# Altium PCB CH32X033F-R0-1v0.PcbDoc
Units mil, origin at the board's own origin, x right, y up, seen from the top; angles counter-clockwise.
Board outline 1535.59 x 1780 mil, 2 copper layers (Top Layer, Bottom Layer); 26 components, 31 nets, 125 pads, 185 vias.
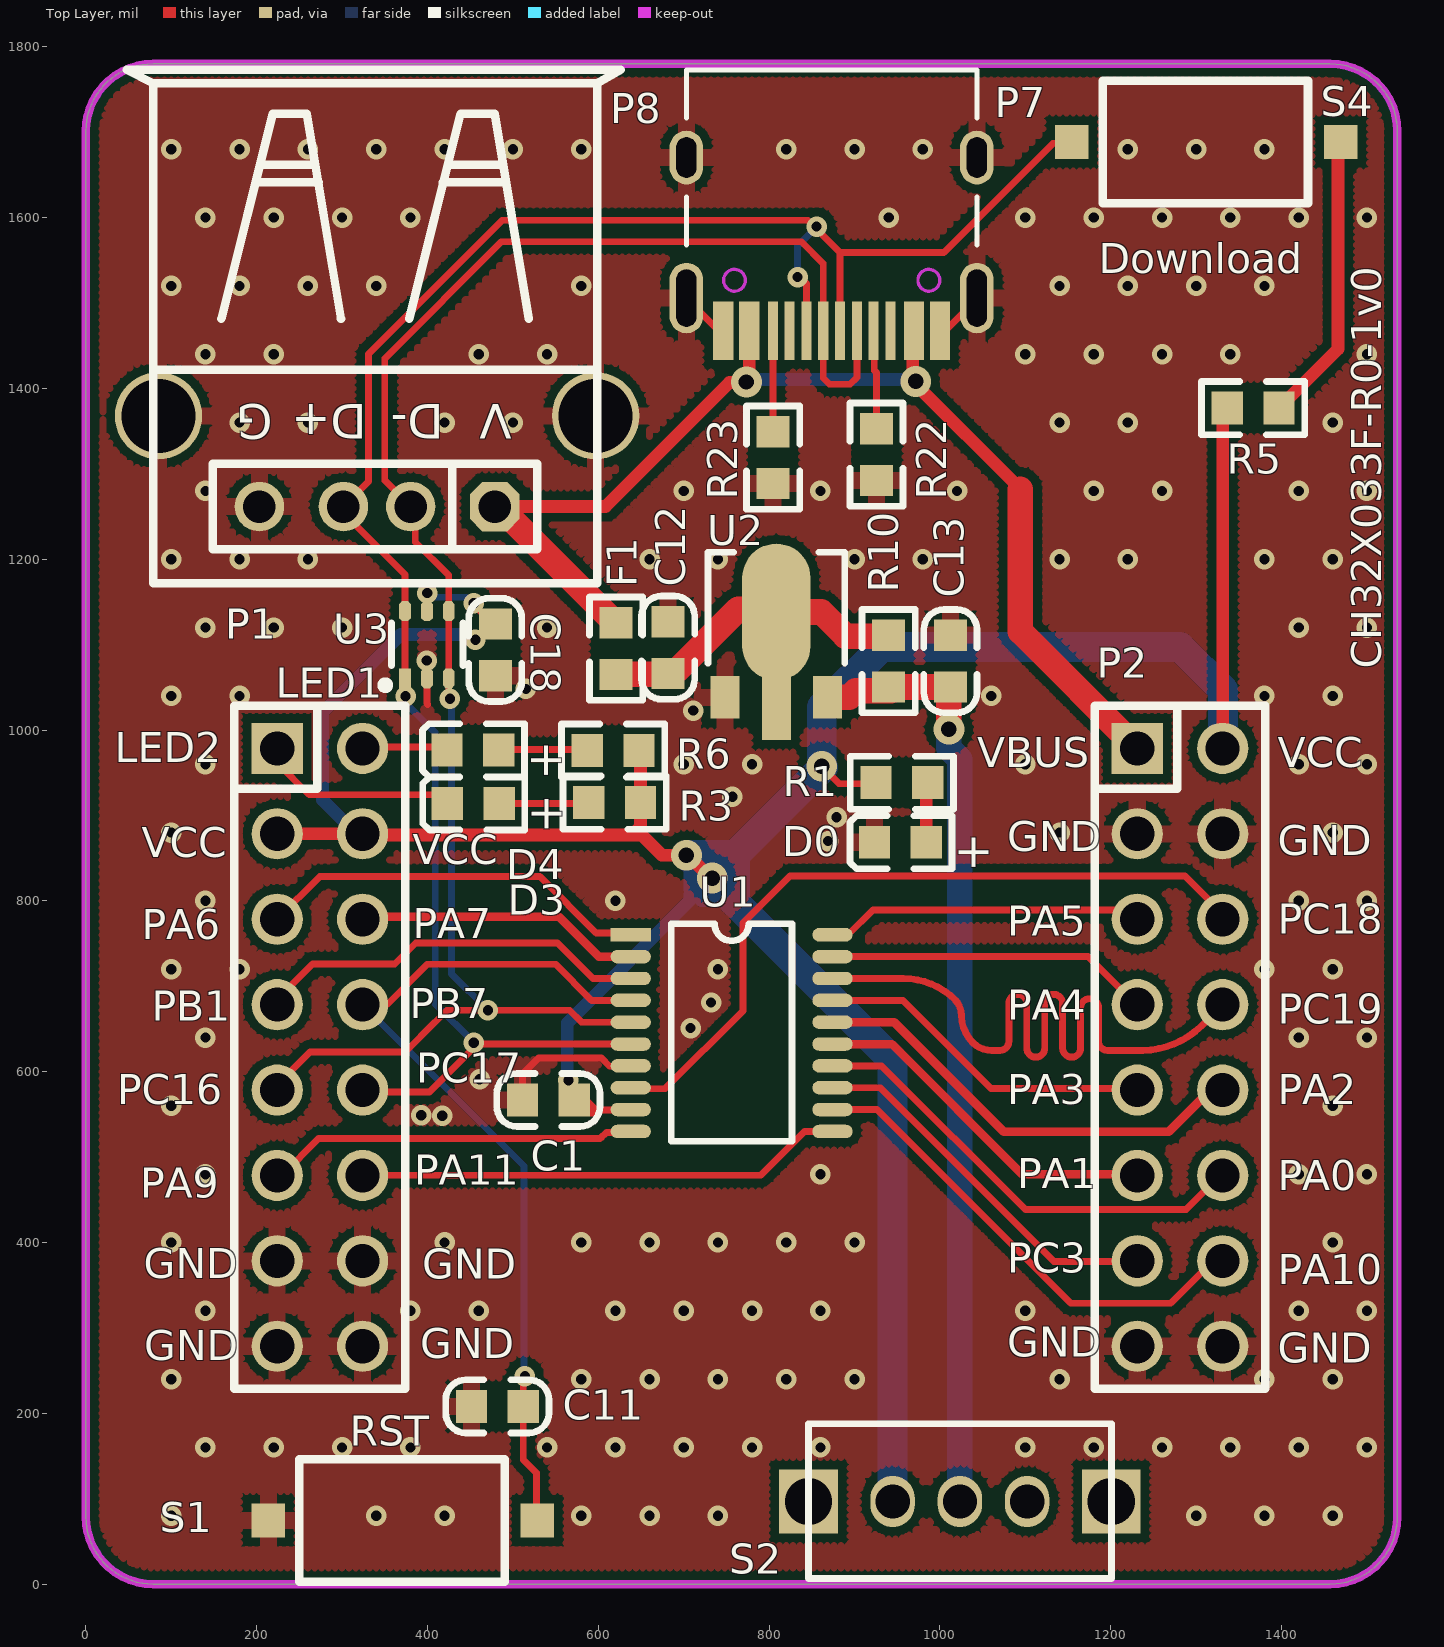
[diagram p0: Top Layer view]
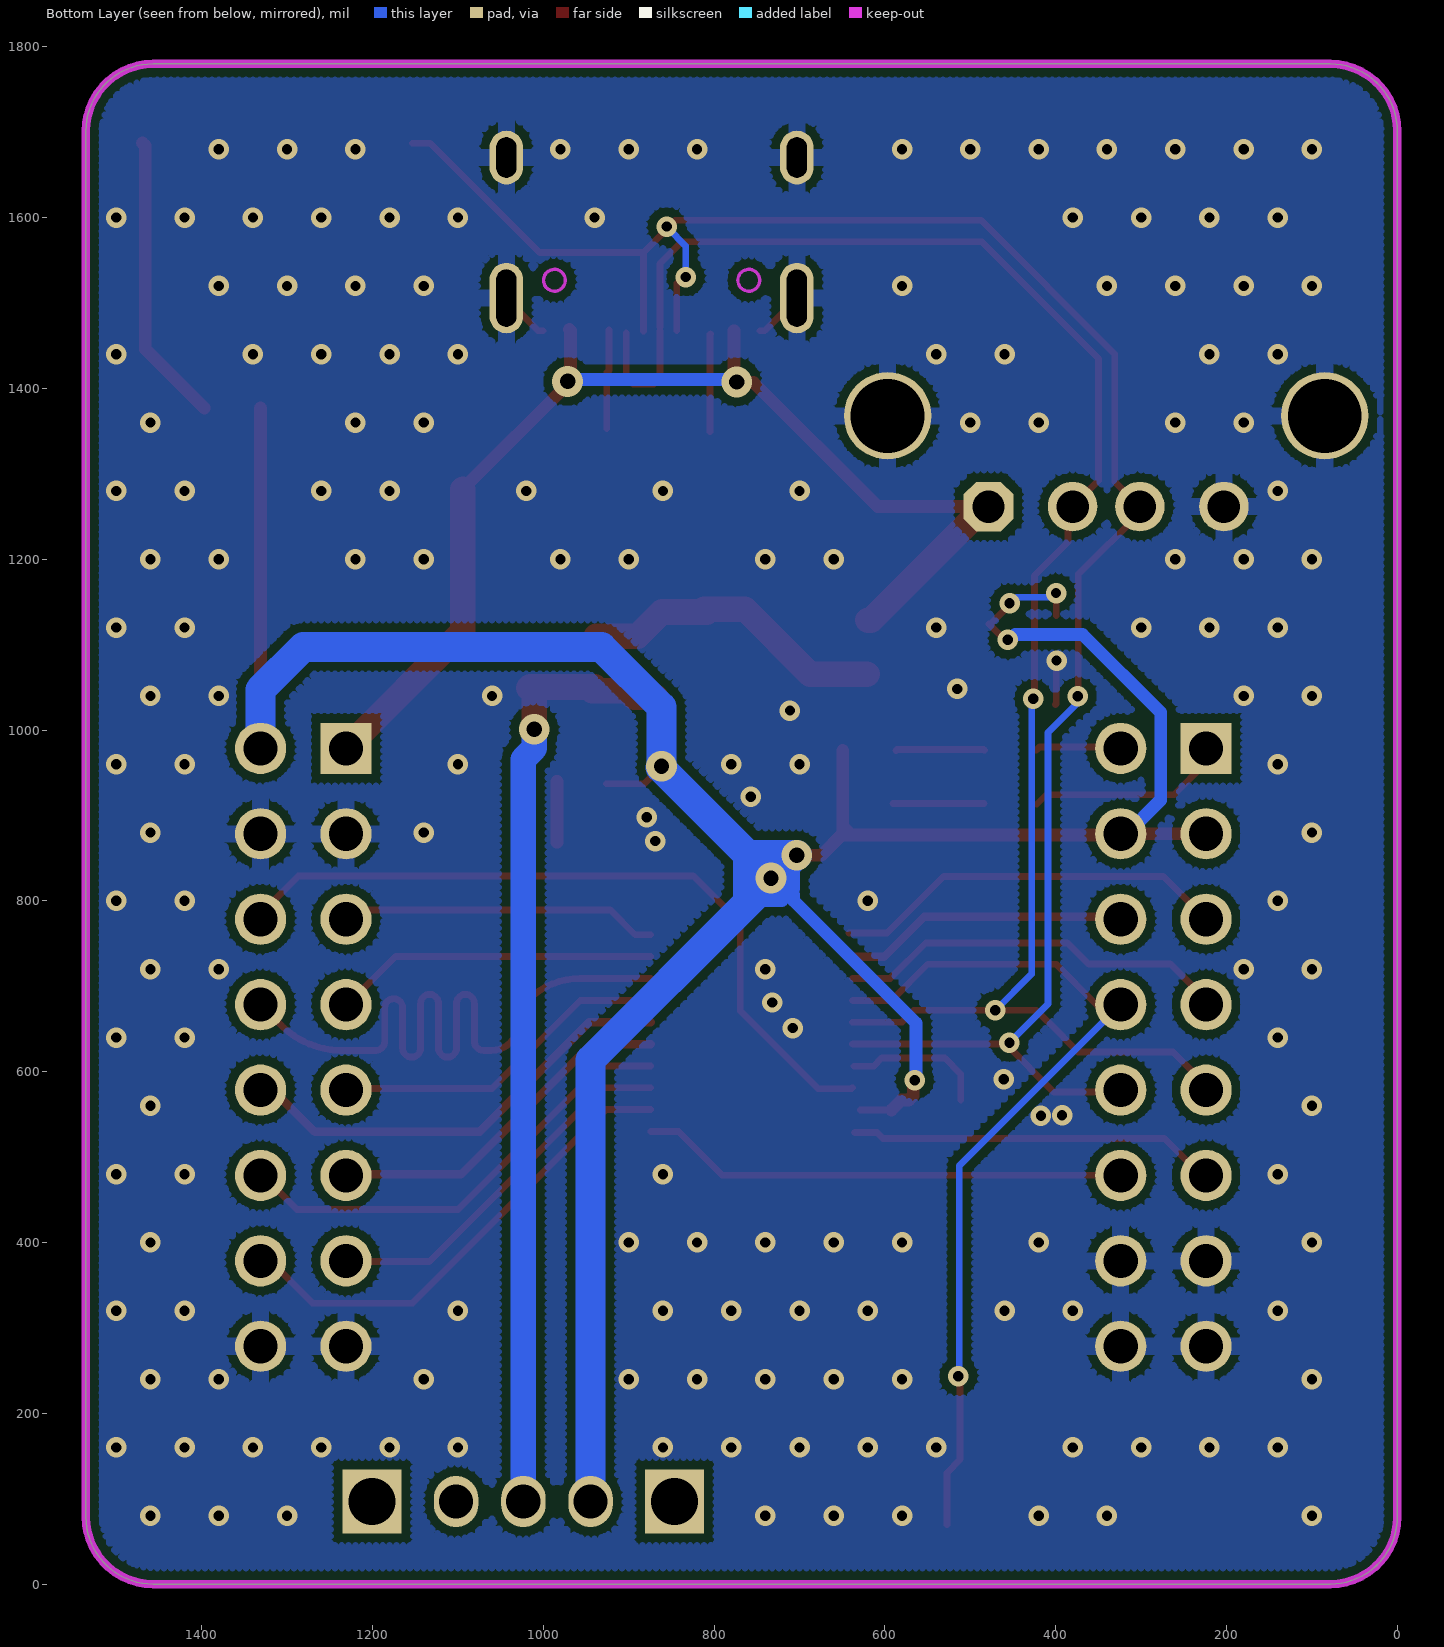
[diagram p1: Bottom Layer view, seen from below]

## Layer stack, top to bottom
Top Solder: solder mask 0.4, Solder Resist, Dk 3.5
Top Layer: signal copper 1.4
Dielectric1: dielectric 12.6, FR-4, Dk 4.8
Bottom Layer: signal copper 1.4
Bottom Solder: solder mask 0.4, Solder Resist, Dk 3.5

## Board outline
0,78.74 0,1701.26 cw(c78.74,1701.26) 78.74,1780 1456.85,1780 cw(c1456.85,1701.26) 1535.59,1701.26 1535.59,78.74 cw(c1456.85,78.74) 1456.85,0 78.74,0 cw(c78.74,78.74)

## Design rules (kind name [scope] priority, off if disabled: settings)
Clearance Clearance_1 [InPolygon] p1: gap=10 ignorepadtopadclearanceinfootprint=FALSE except(0: Arc-Hole Track-Hole SMDPad-Hole THPad-Hole Via-Hole Fill-Hole Poly-Hole Region-Hole Text-Hole)
Clearance [All] p2: gap=6 ignorepadtopadclearanceinfootprint=FALSE except(0: Arc-Hole Track-Hole SMDPad-Hole THPad-Hole Via-Hole Fill-Hole Poly-Hole Region-Hole Text-Hole)
ComponentClearance [All] p1 off: gap=10 collisioncheckmode=3 verticalgap=10 showdistances=FALSE
DiffPairsRouting [All] p1: maxlimit=10 minlimit=7 mostfreqgap=8 toplayer_minwidth=15 toplayer_maxwidth=15 toplayer_prefwidth=15 bottomlayer_minwidth=15 bottomlayer_maxwidth=15 bottomlayer_prefwidth=15 maxuncoupledlength=500
MinimumSolderMaskSliver [All] p1 off: minsoldermaskwidth=10
PolygonConnect PolygonConnect_1 [IsVia] p1: connectstyle=Direct reliefconductorwidth=10 reliefentries=4 polygonreliefangle="90 Angle" airgapwidth=10
PolygonConnect [All] p2: connectstyle=Relief reliefconductorwidth=20 reliefentries=4 polygonreliefangle="90 Angle" airgapwidth=10
RoutingVias [All] p1: holewidth=16 width=28 viastyle="Through Hole" minholewidth=12 minwidth=24 maxholewidth=28 maxwidth=50
SilkToSilkClearance [All] p1 off: silktosilkclearance=10
SilkToSolderMaskClearance [IsPad] p1 off: minsilkscreentomaskgap=10 clearancetoexposedcopper=TRUE
SolderMaskExpansion [All] p1: expansion=2 istentingtop=FALSE
Width [All] p1: maxlimit=100 minlimit=6 preferedwidth=10
25 further rules are at their usual default settings.

## Components (designator, comment, footprint, x,y, rotation, side; value= is the part's Value field where it differs from the comment)
C1 "0.1uF" 0603_C 571.88,566.84 r180 top
C11 "0.1uF" 0603_C 451.41,208.11 r0 top
C12 "10uF" 0603_C 681.7,1066.16 r90 top
C13 "10uF" 0603_C 1012.26,1050.44 r90 top
C18 "0.1uF" 0603_C 479.39,1063.63 r90 top
D0 "POWER  red" 0603+ 984.06,868.62 r180 top
D3 "LED2" 0603+ 483.86,914 r180 top
D4 "LED1" 0603+ 483.43,976.38 r180 top
F1 "500mA" 0603 620.81,1125.75 r270 top
P1 "HEADER 8x2" IDC16-2.54mm 223.97,978.51 r0 top
P2 "Header 8X2" IDC16-2.54mm 1231.02,978.51 r0 top
P7 "TYPE-C" TYPE-C-Receptacle-2.0 873.2,1467.6 r180 top
P8 "USB_A" USBAF 478.73,1261.66 r180 top
R1 "1K" 0603 985.77,938.35 r180 top
R3 "1K" 0603 649.34,914.99 r180 top
R5 "4.7K" 0603 1336.37,1377 r0 top
R6 "1K" 0603 647.67,975.98 r180 top
R10 "NC(0Ω)" 0603 939.89,1050.44 r90 top
R22 "5.1K" 0603 925.71,1352.7 r270 top
R23 "5.1K" 0603 804.71,1349.28 r270 top
S1 "RST" SMD_6.1x3.65x2.5mm-KEY 528.62,74.45 r180 top
S2 "SW" SW1 1023.4,96.69 r180 top
S4 "Download" SMD_6.1x3.65x2.5mm-KEY 1469.38,1688.6 r180 top
U1 "CH32X033F8P6" TSSOP20 638.1,760.33 r270 top
U2 "HT7533" SOT-89 748.48,1038.25 r0 top
U3 "CH412K" SOT-363 373.72,1060.54 r0 top

## Footprints (in the part's own frame and the unit in brackets; to place one, negate y for a bottom-side part, rotate by r counter-clockwise, add the part's x,y. Pads: shape width x height; smd on the part's side, far side on the other; paste and mask are expansions set on the pad)
0603 [mm]
  rect 0.93x0.98 smd: 1(0,0) 2(1.54,0)
  silkscreen extent -0.76,-0.79 2.3,0.79
0603+ [mm]
  rect 0.93x0.98 smd: 1(0,0) 2(1.54,0)
  silkscreen extent -0.76,-0.79 2.27,0.79
0603_C [mm]
  rect 0.93x0.98 smd mask+0.051: 1(0,0) 2(1.54,0)
  silkscreen extent -0.76,-0.79 2.31,0.79
IDC16-2.54mm [mil]
  rect 60x60 hole 40: 1(0,0)
  round 60 hole 40: 2(100,0) 3(0,-100) 4(100,-100) 5(0,-200) 6(100,-200) 7(0,-300) 8(100,-300) 9(0,-400) 10(100,-400) 11(0,-500) 12(100,-500) 13(0,-600) 14(100,-600) 15(0,-700) 16(100,-700)
  silkscreen extent -50,-750 150,50
SMD_6.1x3.65x2.5mm-KEY [mm]
  rect 1x1 smd: 1(0,0) 2(8,0)
  silkscreen extent 0.98,-1.83 7.08,1.83
SOT-89 [mil]
  rect 34x50 smd: 1(0,0) 3(120,0)
  rect 34x100 smd: 2(60,0)
  oval 80x160 smd: ""(60,100)
  silkscreen extent -20,40 140,170
SOT-363 [mm]
  rect 0.35x0.6 smd mask+0.051: 1(0,0)
  oct 0.35x0.6 smd mask+0.051: 2(0.65,0) 3(1.3,0) 4(1.3,2) 5(0.65,2) 6(0,2)
  silkscreen extent -0.7,-0.31 1.73,1.65
SW1 [mm]
  rect 1.75x1.9 hole 1.4: 0(-4.5,0) 0(4.5,0)
  oval 1.321x1.524 hole 1.016: 1(0,0) 2(-2,0) 3(2,0)
  silkscreen extent -4.51,-2.31 4.5,2.29
TSSOP20 [mm]
  rect 0.4x1.2 smd mask+0.05: 1(0,-0.003)
  oval 0.4x1.2 smd mask+0.05: 2(0.65,-0.003) 3(1.3,-0.003) 4(1.951,-0.003) 5(2.601,-0.003) 6(3.251,-0.003) 7(3.899,-0.003) 8(4.549,-0.003) 9(5.199,-0.003) 10(5.85,-0.003) 11(5.85,5.997) 12(5.199,5.997) 13(4.549,5.997) 14(3.899,5.997) 15(3.251,5.997) 16(2.601,5.997) 17(1.951,5.997) 18(1.3,5.997) 19(0.65,5.997) 20(0,5.997)
  silkscreen extent -0.32,1.2 6.14,4.79
TYPE-C-Receptacle-2.0 [mm]
  oval 1x2.1 hole 0.6 slot 1.7 at 90 deg: 0(-4.32,-0.97) 0(4.32,-0.97)
  oval 1x1.6 hole 0.6 slot 1.2 at 90 deg: 0(-4.32,-5.15) 0(4.32,-5.15)
  rect 0.6x1.75 smd mask+0.051: A1(-3.225,0) A4(-2.45,0) B1(3.225,0) B4(2.45,0)
  rect 0.3x1.75 smd mask+0.051: A5(-1.25,0) A6(-0.25,0) A7(0.25,0) A8(1.25,0) B5(1.75,0) B6(0.75,0) B7(-0.75,0) B8(-1.75,0)
  Keep-Out Layer circle w0.1: c2.89,-1.5 r0.325
  Keep-Out Layer circle w0.1: c-2.89,-1.5 r0.325
  silkscreen extent -4.32,-7.75 4.32,-2.55
USBAF [mm]
  round 2.6 hole 2.2: 0(-3,-2.7) 0(10,-2.7)
  oct 1.473x1.473 hole 0.965: 1(0,0)
  round 1.473 hole 0.965: 2(2.5,0) 3(4.5,0) 4(7,0)
  silkscreen extent -3.75,-12.99 10.95,2.29

## Part data
C1 C11 C18: library part Cap, "Capacitor"
C12 C13: library part CAP, "Capacitor"
D0 D3 D4: library part LED0, "Typical INFRARED GaAs LED", LatestRevisionDate=08-Jul-2005, LatestRevisionNote="Mech Layer 1 removed.", PackageReference=LED-0, Published=8-Jun-2000, Publisher="Altium Limited"
F1: library part FUSE1, "Fuse"
P1 P2: "Header, 8-Pin, Dual row"
  P2: LatestRevisionDate=17-Jul-2002, LatestRevisionNote="Re-released for DXP Platform.", Publisher="Altium Limited"
P7: library part TYPE-C1
P8: library part USB, "USB Port"
R1 R3 R6: library part "Res Semi", "Semiconductor Resistor"
R5 R10 R22 R23: library part Res2, "Resistor"
S1: library part KEY
S4: library part KEY1
U1: "RISC-V MCU with USB/ADC/SPI/I2C/UART*4/OA*2/CMP*2"
U2: library part 1117-3.3V
U3: "Qaud ESD protect, high speed"

## Via types
v1: diameter 24, hole 12, Top Layer to Bottom Layer, tented both sides, 179 vias
v2: diameter 36, hole 18, Top Layer to Bottom Layer, tented both sides, 6 vias

## Nets (pads, with @x,y where several pads share a name; then routed paths per layer and width w, separated by ;. In a path a pad name is that pad's centre, name@x,y a point inside that pad or via, vN(x,y) a via of type N, cw(c..) or ccw(c..) an arc to the next point about the centre after c; other vN are vias at no path point)
5V: C12.1 F1.2 R10.2 U2. U2.2 | length 364.8
  Top Layer w30: F1.2 687.33,1065.12 763.82,1141.62 811.31,1141.62 U2.@812.47,1140.45 ; U2. 861.2,1138.25 889.41,1110.04 R10.2@937.76,1110.04
GND: C1.2 C11.1 C12.2 C13.2 C18.1 D0.2 P1.13 P1.14 P1.15 P1.16 P2.3 P2.4 P2.15 P2.16 P7.0 P7.A1 P7.B1 P8.0 P8.4 R22.2 R23.2 S1.2 U1.7 U2.1 U3.2 | length 332.8
  Top Layer w8: v1@399,1076.35 399.31,1076.04 399.31,1055.54 399.31,1032.14 ccw(c402.72,1032.14) 400.31,1029.73 ; C1.2 511.25,597.36 529.88,615.99 603.74,615.99 613.39,606.34 U1.7@636.03,606.34 ; P7.0@703.81,1504.45 740.66,1467.6 P7.B1 ; P7.A1 1006.3,1467.6 P7.0@1045.13,1506.42
  other v1: 100,80 340,80 420,80 580,80 660,80 740,80 1300,80 1380,80 1460,80 140,160 220,160 300,160 380,160 540,160 620,160 700,160 780,160 860,160 1100,160 1180,160 1260,160 1340,160 1420,160 1500,160 100,240 580,240 660,240 740,240 820,240 900,240 1140,240 1380,240 1460,240 140,320 380,320 460,320 620,320 700,320 780,320 860,320 1100,320 1420,320 1500,320 100,400 420,400 580,400 660,400 740,400 820,400 900,400 1460,400 140,480 860,480 1420,480 1500,480 417.34,548.49 392.63,548.84 100,560 1460,560 461,591 140,640 1420,640 1500,640 708,651 732,681 100,720 180,720 740,720 1380,720 1460,720 140,800 620,800 1420,800 1500,800 869,870 100,880 1140,880 1460,880 879,898 757,922 140,960 700,960 780,960 1100,960 1420,960 1500,960 711.2,1022.89 100,1040 180,1040 1060,1040 1380,1040 1460,1040 515.25,1048.11 399,1081.35 140,1120 220,1120 300,1120 540,1120 1420,1120 1500,1120 100,1200 180,1200 260,1200 660,1200 740,1200 900,1200 980,1200 1140,1200 1220,1200 1380,1200 1460,1200 140,1280 700,1280 860,1280 1020,1280 1180,1280 1260,1280 1420,1280 1500,1280 180,1360 260,1360 420,1360 500,1360 1140,1360 1220,1360 1460,1360 140,1440 220,1440 460,1440 540,1440 1100,1440 1180,1440 1260,1440 1340,1440 1500,1440 100,1520 180,1520 260,1520 340,1520 580,1520 1140,1520 1220,1520 1300,1520 1380,1520 140,1600 220,1600 300,1600 380,1600 940,1600 1100,1600 1180,1600 1260,1600 1340,1600 1420,1600 1500,1600 100,1680 180,1680 260,1680 340,1680 420,1680 500,1680 580,1680 820,1680 900,1680 980,1680 1220,1680 1300,1680 1380,1680
LED1: D4.2 P1.2 | length 101
  Top Layer w8: P1.2 325.47,980 419.19,980 D4.2
LED2: D3.2 P1.1 | length 235.1
  Top Layer w8: P1.1 223.97,961.76 261.48,924.26 411.11,924.26 D3.2@422.23,913.13
NetC13_1: C13.1 R10.1 S2.1 U2.3 | length 1108.2
  Top Layer w30: U2.3 893.64,1038.25 901.57,1046.18 942.62,1046.18 R10.1@942.93,1046.49 ; R10.1 1015.61,1050.44 C13.1@1016.82,1049.22 ; v2(1010.47,1001.05) 1010.47,1043.34 C13.1@1011.11,1043.98
  Bottom Layer w30: v2(1010.47,1001.05) 1010.47,978.85 1023.4,965.92 S2.1
NetD0_1: D0.1 R1.1 | length 71.4
  Top Layer w15: D0.1 R1.1@984.06,940.03
NetD3_1: D3.1 R3.2 | length 106.9
  Top Layer w8: D3.1 R3.2@590.74,914
NetD4_1: D4.1 R6.2 | length 104.6
  Top Layer w8: D4.1 484.39,977.33 585.69,977.33 R6.2
NetP7_A5: P7.A5 R22.1 | length 116.9
  Top Layer w8: P7.A5@923.14,1468.57 923.14,1421.11 925.71,1418.54 R22.1
NetP7_B5: P7.B5 R23.1 | length 114.8
  Top Layer w8: P7.B5@804.28,1463.86 804.71,1463.44 R23.1
NetR5_2: R5.2 S4.1 | length 340.3
  Top Layer w15: R5.2 1466,1446 1466,1684.25 S4.1@1469.19,1687.44
PA0: P2.12 U1.14 | length 543.2
  Top Layer w8: U1.14 931.66,606.83 1099.98,438.51 1288.35,438.51 P2.12@1330.3,480.46
PA1: P2.11 U1.15 | length 419.4
  Top Layer w10: U1.15 943.76,632.33 1096.45,479.63 1226.52,479.63 P2.11@1229.25,476.91
PA2: P2.10 U1.16 | length 526.4
  Top Layer w10: U1.16 946.43,657.93 1074.61,529.75 1267.88,529.75 1315.3,577.16 P2.10@1327.93,577.16
PA3: P2.9 U1.17 | length 402.5
  Top Layer w8: U1.17 956.74,683.53 1059.94,580.32 P2.9@1233.98,580.32
PA4: P2.7 U1.19 | length 380.1
  Top Layer w8: U1.19 916.1,734.73 1173.22,734.73 1229.44,678.51 P2.7
PA5: P2.5 U1.20 | length 371.3
  Top Layer w8: U1.20 892.37,760.33 921.45,789.41 1215.03,789.41 P2.5@1228.1,776.35
PA6: P1.5 U1.1 | length 466.2
  Top Layer w8: P1.5 273.86,828.39 531.47,828.39 597.56,762.3 U1.1@642.13,762.3
PA7: P1.6 U1.2 | length 331.9
  Top Layer w10: P1.6@325.51,781.52 553.76,781.52 600.54,734.73 U1.2
PA9: P1.11 U1.10 | length 433.7
  Top Layer w8: P1.11 229.43,478.51 272.5,521.57 602.01,521.57 603.54,523.1 ; 602.75,522.09 609.44,528.77 U1.10@635.67,528.77
PA10: P2.14 U1.12 | length 571
  Top Layer w8: U1.12 926.32,555.63 1153.07,328.88 1270.3,328.88 1311.35,369.93 P2.14@1334.25,369.93
PA11: P1.12 U1.11 | length 570.8
  Top Layer w8: P1.12@324.67,478.64 790.09,478.64 841.47,530.03 U1.11
PB1: P1.7 U1.3 | length 469.4
  Top Layer w8: P1.7@216.38,677 265.57,726.18 361.63,726.18 386.22,750.78 552.22,750.78 593.87,709.13 U1.3
PB7: C11.2 P1.8 S1.1 U1.4 | length 1039.8
  Top Layer w8: P1.8@327.38,678.36 352.29,678.36 399.8,725.88 549.87,725.88 592.22,683.53 U1.4 ; v1@511.79,242.84 512.05,242.58 C11.2 512.05,145.86 527.52,130.38 S1.1@527.52,69.47
  Bottom Layer w8: P1.8 513.01,489.47 v1@513.01,244.67
  other v1: 514.01,243.39
PC3: P2.13 U1.13 | length 447.6
  Top Layer w8: U1.13 929.93,581.23 1133.33,377.83 P2.13@1237.54,377.83
PC16/11: P1.9 P7.A7 P7.B7 P8.2 U1.5 U3.3 U3.4 | length 2068.1
  Top Layer w8: P1.9@221.76,582.47 262.49,623.2 373.93,623.2 408.65,657.93 ; P8.2 350,1291.96 350,1435 486.76,1571.76 837.61,1571.76 863.28,1546.09 P7.A7@863.28,1471.38 ; P8.2@385.65,1261.08 385.65,1220.35 424.9,1181.1 424.9,1134.28 424.9,1055.54 v1@424.9,1034.32 ; 410.23,659.24 422.9,671.91 566.17,671.91 580.15,657.93 U1.5 ; P7.A7 863.35,1412.29 870.76,1404.89 894.78,1404.89 902.92,1413.03 P7.B7@902.92,1464.92
  Bottom Layer w8: v1@428.19,1028.06 428.19,714.51 v1(470.78,671.91)
  other v1: 426.24,1036.65
PC17/10: P1.10 P7.A6 P7.B6 P8.3 S4.2 U1.6 U3.1 U3.6 | length 2377.6
  Top Layer w8: P8.3@300.86,1254.88 373.72,1182.02 373.72,1134.28 373.72,1055.54 v1@373.72,1037.67 ; P8.3 331,1291.1 331,1440.31 487.64,1596.95 845.1,1596.95 854.05,1588 882.86,1559.19 ; P1.10@330.12,576.33 402.36,576.33 458.36,632.33 U1.6 ; v1@837.51,1529.09 843.67,1522.93 P7.B6 ; P7.A6@882.86,1467.04 882.86,1559.19 ; S4.2@1153.34,1687.03 1132.33,1687.03 1004.48,1559.19 882.86,1559.19
  Bottom Layer w8: v1@374.37,1031.9 408.97,997.3 408.97,679.16 v1(454.2,633.93) ; v1(833.24,1530.4) 833.24,1566.87 v1@853.61,1587.24
  other v1: 374.29,1039.47 855.58,1589.53
PC18: P2.6 U1.8 | length 874.7
  Top Layer w8: U1.8 639.13,580.08 678.24,580.08 769.35,671.19 769.35,774.04 824.32,829.01 1082.98,829.01 1286.87,829.01 P2.6@1330.69,785.19
PC19: P2.8 U1.18 | length 883.6
  Top Layer w8: U1.18 957.16,709.13 cw(c957.16,623.26) 990.06,702.58 cw(c957.16,623.26) 1017.88,683.98 cw(c1000.53,666.62) 1025.07,666.62 ccw(c1071.13,666.62) 1038.56,634.05 ccw(c1060.57,656.06) 1060.57,624.93 1066.19,624.93 1070.19,624.93 ccw(c1070.19,635.43) 1080.69,635.43 1080.69,680 cw(c1091.19,680) 1101.69,680 1101.69,627.49 ccw(c1112.19,627.49) 1122.69,627.49 1122.69,680 cw(c1133.19,680) 1143.69,680 1143.69,627.49 ccw(c1154.19,627.49) 1164.69,627.49 1164.69,674.9 cw(c1175.19,674.9) 1185.69,674.9 1185.69,635.43 ccw(c1196.19,635.43) 1196.19,624.93 1236.03,624.93 ccw(c1236.03,724.93) 1237.7,624.95 ccw(c1236.03,724.93) 1264.96,629.21 ccw(c1236.03,724.93) 1306.74,654.22 P2.8 1331.88,679.36 P2.8@1331.88,682.16
VBUS: F1.1 P2.1 P7.A4 P7.B4 P8.1 | length 1402.7
  Top Layer w15: P8.1@483.27,1261.66 608.42,1261.66 753.74,1406.99 v2@771.36,1406.99 ; v2@776.74,1413.78 P7.B4 ; P7.A4@969.57,1468.97 968.18,1467.58 968.18,1408.18 1094.21,1282.15
  Top Layer w30: P8.1 P8.1@483.27,1261.66 ; P8.1@478.89,1266.04 P8.1@483.27,1261.66 ; F1.1@619.96,1128.76 616.18,1128.76 P8.1@483.27,1261.66 ; 1094.21,1282.15 1094.21,1115.32 P2.1
  Bottom Layer w15: v2@775.42,1410.5 969.9,1410.5 v2@972.53,1407.87
  other v2: 773.42,1407.5 971.54,1408.2
VCC: C1.1 C18.2 P1.3 P1.4 P2.2 R1.2 R3.1 R5.1 R6.1 S2.3 U1.9 U3.5 | length 3898.9
  Top Layer w8: U3.5@399.31,1134.28 U3.5 v1@399.31,1151.51 ; v1@453.75,1147.07 476.56,1124.26 478.43,1124.26 458.44,1104.27 v1@458.44,1103.31 ; 592.25,555.26 U1.9@628.89,555.26 ; v2@866.28,952.44 881.55,937.18 R1.2@925.92,937.18
  Top Layer w15: P1.3 P1.4 ; P1.4@325.45,877.03 639.47,877.03 ; v1(565.02,589.99) 566.74,588.26 566.74,571.99 C1.1 580.68,566.84 592.25,555.26 ; 649.34,877.03 639.47,877.03 ; R6.1@649.34,975.98 R3.1 649.34,886.89 ; v2(733.35,826.7) 731.62,826.7 704.88,853.44 v2(703.14,853.44) 674.41,853.44 649.34,878.51 649.34,886.89 ; P2.2 R5.1@1331.02,1377 ; 639.47,877.03 649.34,886.89
  Bottom Layer w8: v1@399.63,1155.45 445.18,1155.45 v1@449.72,1150.91
  Bottom Layer w15: P1.4@318.03,877.22 276.98,918.28 276.98,1020.43 368.55,1112 447.31,1112 453.66,1105.65 v1(456.09,1105.65) ; v1@565.02,593.99 563.56,595.45 563.56,656.9 707.16,800.51 707.16,807.19 ; v2@709.24,848.99 707.16,846.91 707.16,813.87 713.84,807.19 ; v2@732.44,825.79 713.84,807.19 ; 761.18,797.05 757.72,800.51 720.53,800.51 713.84,807.19
  Bottom Layer w35: v2(703.14,853.44) 703.33,853.63 760.28,853.63 ; v2@709.24,848.99 732.44,825.79 757.72,800.51 760.28,803.07 760.28,853.63 ; v2(733.35,826.7) 760.28,853.63 ; 761.18,797.05 944.66,613.57 S2.3 ; v2(861.59,957.52) 861.59,1026.88 932.09,1097.37 1281.14,1097.37 1331.34,1047.17 P2.2@1331.34,978.92 ; v2@862.89,956.23 760.28,853.63
  other v1: 454.12,1148.35 399.63,1160.45
pads on no net: P7.A8 P7.B8 S2.0 S2.2

## Polygon pours and split planes (outlines as drawn)
GND on Bottom Layer "Top Layer-No Net" (hatched 90Degree grid 8 track 8, remove dead copper, pour order 0): -0.59,1778.82 5.29,1772.94 1528.82,1772.94 1528.82,2.35 1522.94,-3.53 1514.12,5.29 -9.41,5.29 -9.41,1775.88 -0.59,1784.71 2.35,1784.71
GND on Top Layer "Top Layer-No Net" (hatched 90Degree grid 8 track 8, remove dead copper, pour order 1): 2.94,1775.84 1530.13,1775.84 1537.21,1782.92 1537.21,7.89 21.82,7.89 5.3,-8.64 2.94,-6.28 2.94,1773.48

## Keep-outs
Keep-Out Layer:
  the board outline again, w10

## Silkscreen, mask and mechanical layers (free items; w line width, h text height)
Top Overlay:
  text "CH32X033F-R0-1v0" at 1516.59,1072 h35 r90
  text "LED1" at 222.03,1037.8 h35
  text "LED2" at 33.61,962.16 h35
  text "VBUS" at 1043.79,956.4 h35
  text "VCC" at 1395.65,956.4 h35
  text "GND" at 1078.78,857.81 h35
  text "GND" at 1395.65,853.63 h35
  text "VCC" at 65.32,851.33 h35
  text "VCC" at 382.45,842.65 h35
  text "PC18" at 1395.65,761.74 h35
  text "PA5" at 1078.78,759.22 h35
  text "PA7" at 382.79,756.3 h35
  text "PA6" at 65.32,754.79 h35
  text "PB7" at 379.39,662.38 h35
  text "PA4" at 1078.78,660.62 h35
  text "PB1" at 77.22,659.57 h35
  text "PC19" at 1395.65,656.25 h35
  text "PC17" at 387,587 h35
  text "PC16" at 36.69,562.04 h35
  text "PA3" at 1078.78,562.03 h35
  text "PA2" at 1395.65,561.64 h35
  text "PA11" at 384.39,467.72 h35
  text "PA1" at 1090.44,463.44 h35
  text "PA0" at 1395.65,460.91 h35
  text "PA9" at 63.81,452.21 h35
  text "PC3" at 1078.78,364.85 h35
  text "GND" at 67.67,358.16 h35
  text "GND" at 393.8,357.77 h35
  text "PA10" at 1395.65,351.34 h35
  text "GND" at 1078.78,266.26 h35
  text "GND" at 391.43,264.21 h35
  text "GND" at 68.47,261.83 h35
  text "GND" at 1395.65,259.45 h35
Mechanical 1:
  the board outline again, w10

## Text inside footprints (layer, text, board x,y; h text height)
D0: Top Overlay "+" at 1022.13,879.61 h40 r270
D3: Top Overlay "+" at 521.94,924.99 h40 r270
D4: Top Overlay "+" at 521.51,987.37 h40 r270
P8: Top Overlay "D-" at 418.73,1381.66 h40 r180; Top Overlay "D+" at 328.73,1381.66 h40 r180; Top Overlay "V" at 498.73,1381.66 h40 r180; Top Overlay "G" at 218.73,1381.66 h40 r180